# Altium PCB TCS3200.PcbDoc
Units mm, origin at the board's own origin, x right, y up, seen from the top; angles counter-clockwise.
Board outline 152.4 x 101.6 mm, 2 copper layers (Top Layer, Bottom Layer); 21 components, 15 nets, 59 pads, 11 vias.
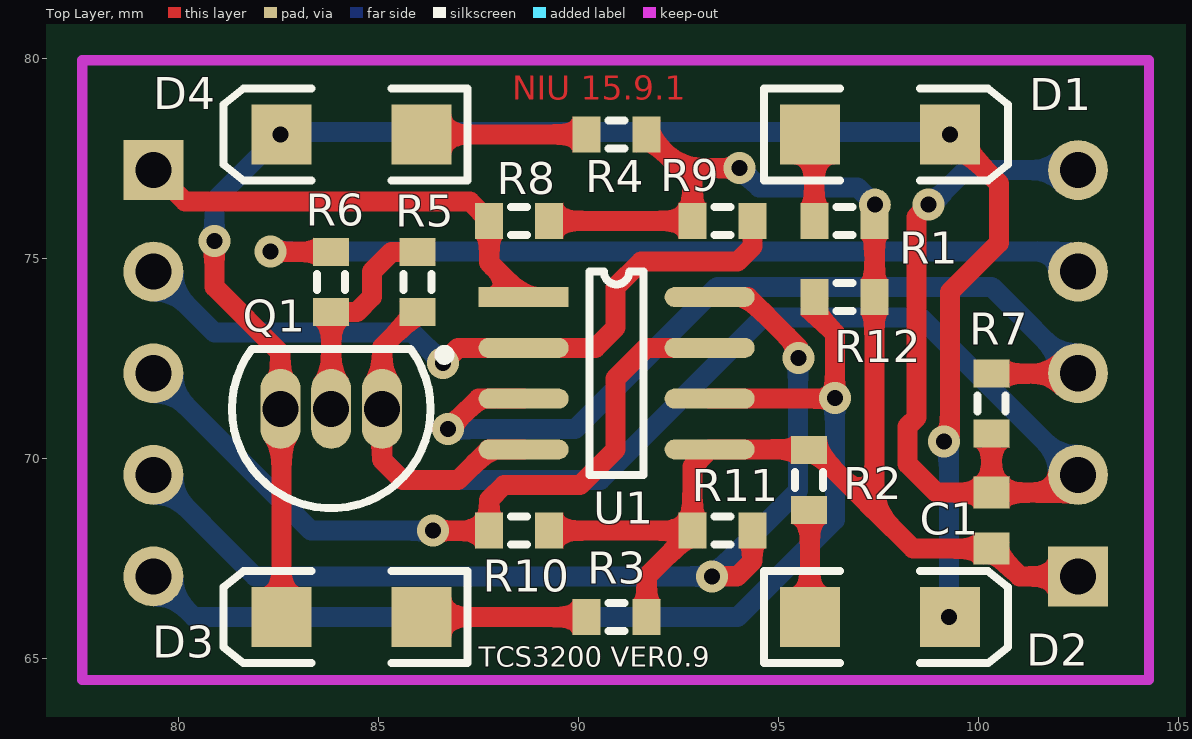
[diagram p0: Top Layer view]
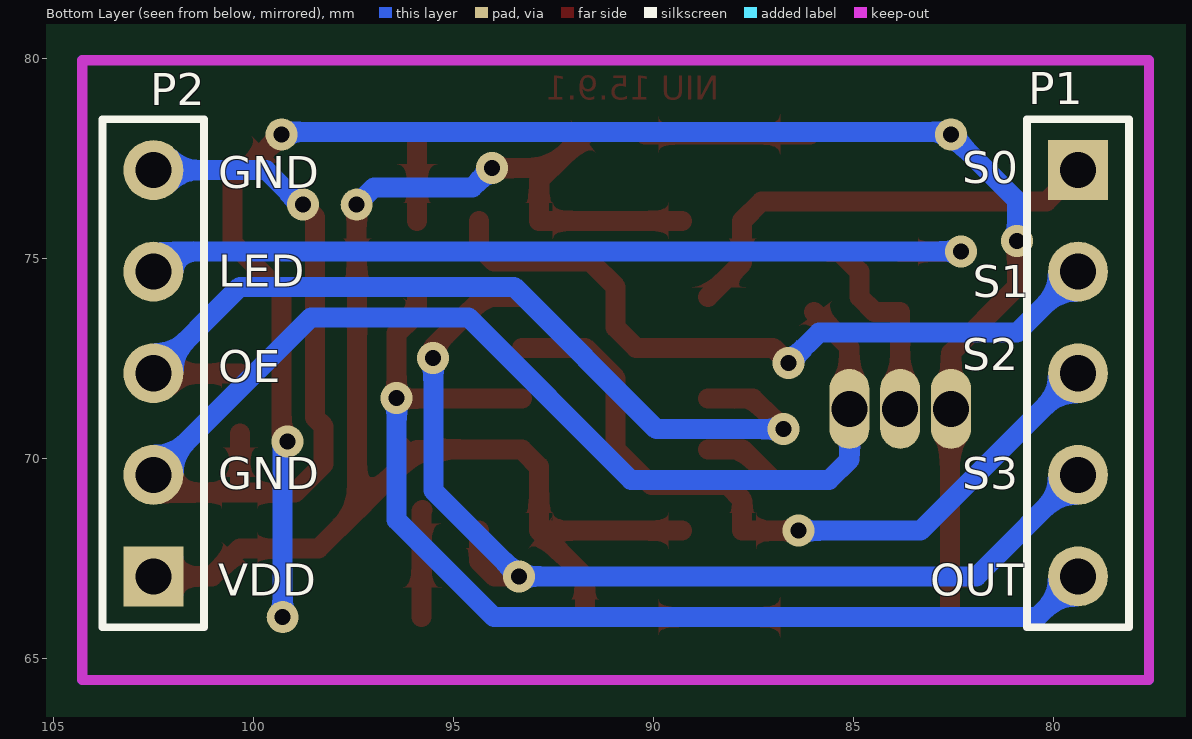
[diagram p1: Bottom Layer view, seen from below]

## Layer stack, top to bottom
Top Solder: solder mask 0.0102, Solder Resist, Dk 3.5
Top Layer: signal copper 0.0356
Dielectric 1: dielectric 0.32, FR-4, Dk 4.8
Bottom Layer: signal copper 0.0356
Bottom Solder: solder mask 0.0102, Solder Resist, Dk 3.5

## Board outline
25.4,25.4 177.8,25.4 177.8,127 25.4,127

## Design rules (kind name [scope] priority, off if disabled: settings)
Clearance [All] p1: gap=0.254
PolygonConnect [All] p1: connectstyle=Relief reliefconductorwidth=0.254 reliefentries=4 polygonreliefangle="90 Angle" airgapwidth=0.254
RoutingVias [All] p1: holewidth=0.4 width=0.8 viastyle="Through Hole" minholewidth=0.4 minwidth=0.8 maxholewidth=0.5 maxwidth=1
SolderMaskExpansion [All] p1: expansion=0.102
UnpouredPolygon [All] p1: allowunpoured=FALSE
Width Power [InNet('VCC','GND','VDD')] p1: maxlimit=1 minlimit=0.5 preferedwidth=0.5
Width Normal [All] p2: maxlimit=0.5 minlimit=0.254 preferedwidth=0.254
29 further rules are at their usual default settings.

## Components (designator, comment, footprint, x,y, rotation, side; value= is the part's Value field where it differs from the comment)
C1 "Cap Semi" 1608[0603] 100.33,68.453 r270 top
D1 "LED" 3.2X1.6X1.1 97.536,78.105 r0 top
D2 "LED" 3.2X1.6X1.1 97.536,66.04 r0 top
D3 "LED" 3.2X1.6X1.1 84.328,66.04 r180 top
D4 "LED" 3.2X1.6X1.1 84.328,78.105 r180 top
P1 "Header 5" HDR1X5 79.375,77.216 r270 bottom
P2 "Header 5" HDR1X5 102.489,67.056 r90 bottom
Q1 "2N3904" TO-92A 83.82,71.247 r90 top
R1 "" J1-0603 96.647,75.946 r0 top
R2 "" J1-0603 95.758,69.469 r90 top
R3 "" J1-0603 90.955,66.04 r0 top
R4 "" J1-0603 90.955,78.105 r0 top
R5 "" J1-0603 85.979,74.422 r270 top
R6 "" J1-0603 83.82,74.422 r270 top
R7 "" J1-0603 100.33,71.374 r90 top
R8 "" J1-0603 88.519,75.946 r180 top
R9 "" J1-0603 93.599,75.946 r0 top
R10 "" J1-0603 88.519,68.199 r180 top
R11 "" J1-0603 93.599,68.199 r0 top
R12 "" J1-0603 96.647,74.041 r0 top
U1 "TCS3200" TCS3200 88.63,74.041 r0 top

## Footprints (in the part's own frame and the unit in brackets; to place one, negate y for a bottom-side part, rotate by r counter-clockwise, add the part's x,y. Pads: shape width x height; smd on the part's side, far side on the other; paste and mask are expansions set on the pad)
3.2X1.6X1.1 [mm] "SMT LED; 2 Flat Leads"
  rect 1.5x1.5 smd: 1(-1.75,0) 2(1.75,0)
  silkscreen extent -2.9,-1.15 3.2,1.15
1608[0603] [mm] "Chip Capacitor, Body 1.6x0.8mm, IPC High Density"
  rect 0.8x0.9 smd: 1(-0.7,0) 2(0.7,0)
  body extent -0.87,-0.48 0.87,0.48, height 1.3
HDR1X5 [mm] "Connector; Header; 5 Position"
  rect 1.5x1.5 hole 0.9: 1(0,0)
  round 1.5 hole 0.9: 2(2.54,0) 3(5.08,0) 4(7.62,0) 5(10.16,0)
  silkscreen extent -1.27,-1.27 11.43,1.27
J1-0603 [mm] "Chip Resistor, Body 1.6x0.8mm, IPC High Density"
  rect 0.7x0.9 smd: 1(-0.75,0) 2(0.75,0)
  silkscreen extent -0.2,-0.35 0.2,0.35, body extent -0.85,-0.48 0.85,0.48, height 0.9
TCS3200 [mm]
  rect 2.25x0.5 smd: 1(0,0)
  oval 2.25x0.5 smd: 2(0,-1.27) 3(0,-2.54) 4(0,-3.81) 5(4.65,-3.81) 6(4.65,-2.54) 7(4.65,-1.27) 8(4.65,0)
  silkscreen extent 1.65,-4.44 3,0.64
TO-92A [mm] "TO, Flat Index; 3 In-Line, Axial Leads; Body Dia. 4.5mm; Leads 0.51 x 0.48 mm (max)"
  oval 2x1 hole 0.9: 1(0,-1.27) 2(0,0) 3(0,1.27)
  silkscreen extent -2.48,-2.96 1.5,2.48, body extent -2.5,-2.5 1.5,2.5, height 6.86

## Part data
C1: "Capacitor (Semiconductor SIM Model)"
D1 D2 D3 D4: library part LED2, "Typical RED, GREEN, YELLOW, AMBER GaAs LED"
P1 P2: "Header, 5-Pin"
Q1: "NPN General Purpose Amplifier"
R1 R2 R3 R4 R5 R6 R7 R8 R9 R10 R11 R12: library part Res3, "Resistor"

## Free pads (board coordinates)
  round 0.8 hole 0.4: 0(82.55,78.105) 0(97.409,76.352) 0(99.258,66.04) 0(99.286,78.105)

## Via types
v1: diameter 0.8, hole 0.4, Top Layer to Bottom Layer, 11 vias

## Nets (pads, with @x,y where several pads share a name; then routed paths per layer and width w, separated by ;. In a path a pad name is that pad's centre, name@x,y a point inside that pad or via, vN(x,y) a via of type N, cw(c..) or ccw(c..) an arc to the next point about the centre after c; other vN are vias at no path point)
GND: C1.1 P2.2 P2.5 Q1.1 R5.2 R7.1 U1.4 | length 47.3
  Top Layer w0.5: R5.2 85.09,72.783 Q1.1 85.09,69.977 85.598,69.469 86.995,69.469 87.757,70.231 U1.4 ; v1(98.755,76.352) 98.45,76.048 98.45,71.027 98.232,70.809 98.232,69.867 98.946,69.153 C1.1 ; R7.1 C1.1 ; P2.2 102.046,69.153 C1.1
  Bottom Layer w0.5: Q1.1 85.09,69.977 85.598,69.469 90.551,69.469 94.615,73.533 98.552,73.533 P2.2 ; v1(98.755,76.352) 98.812,76.352 99.675,77.216 P2.5
LED: P2.4 R6.1 | length 21
  Top Layer w0.5: v1@82.55,75.184 82.562,75.172 R6.1
  Bottom Layer w0.5: v1(82.296,75.184) P2.4@101.981,75.184
NetD1_1: D1.1 R1.1 | length 2
  Top Layer w0.5: R1.1 D1.1@95.897,77.994
NetD1_2: D1.2 D2.2 D3.2 D4.2 pad.0@82.55,78.105 pad.0@99.258,66.04 pad.0@99.286,78.105 Q1.3 | length 43.4
  Top Layer w0.5: v1(80.899,75.438) 80.899,74.295 82.55,72.644 Q1.3 82.578,71.219 D3.2 ; v1(99.136,70.434) 99.286,70.584 99.286,74.168 100.508,75.39 100.508,76.883 D1.2
  Bottom Layer w0.5: v1(80.899,75.438) 80.899,76.454 82.55,78.105 82.616,78.171 99.22,78.171 pad.0@99.286,78.105 ; v1(99.136,70.434) 99.258,70.312 pad.0@99.258,66.04
NetD2_1: D2.1 R2.1 | length 2.7
  Top Layer w0.5: R2.1 95.786,68.691 D2.1
NetD3_1: D3.1 R3.1 | length 4.1
  Top Layer w0.5: D3.1 R3.1
NetD4_1: D4.1 R4.1 | length 4.1
  Top Layer w0.5: D4.1 R4.1
NetQ1_2: Q1.2 R5.1 R6.2 | length 5.2
  Top Layer w0.5: Q1.2 R6.2 84.467,73.672 84.836,74.041 84.836,74.676 85.332,75.172 R5.1@85.598,75.172
OE: P2.3 R7.2 U1.3 | length 22.5
  Top Layer w0.5: v1(86.741,70.739) 87.503,71.501 U1.3 ; R7.2 102.477,72.124 P2.3
  Bottom Layer w0.5: v1(86.741,70.739) 89.916,70.739 93.472,74.295 100.33,74.295 P2.3
OUT: P1.5 R12.1 U1.6 | length 27.4
  Top Layer w0.5: U1.6 96.393,71.501 v1(96.408,71.516) 96.408,73.137 95.897,73.648 R12.1
  Bottom Layer w0.5: P1.5 80.391,66.04 93.98,66.04 96.408,68.468 v1(96.408,71.516)
S0: P1.1 R8.2 U1.1 | length 11.2
  Top Layer w0.5: P1.1 80.162,76.429 87.286,76.429 R8.2 87.769,74.902 U1.1
S1: P1.2 R9.2 U1.2 | length 18.2
  Top Layer w0.5: v1(86.614,72.39) 86.995,72.771 U1.2 90.424,72.771 90.932,73.279 90.932,74.295 91.567,74.93 93.98,74.93 94.349,75.299 R9.2
  Bottom Layer w0.5: P1.2 80.899,73.152 85.852,73.152 v1@86.487,72.517
S2: P1.3 R10.2 U1.7 | length 19.2
  Top Layer w0.5: v1(86.36,68.199) 86.233,68.199 R10.2 87.769,68.973 88.138,69.342 90.043,69.342 90.932,70.231 90.932,72.009 91.694,72.771 U1.7
  Bottom Layer w0.5: P1.3 83.312,68.199 v1(86.36,68.199)
S3: P1.4 R11.2 U1.8 | length 26.3
  Top Layer w0.5: U1.8 94.234,74.041 95.504,72.771 v1(95.504,72.517) ; v1(93.345,67.056) 93.968,67.056 94.349,67.437 R11.2
  Bottom Layer w0.5: P1.4 81.915,67.056 v1(93.345,67.056) 95.489,69.2 95.489,72.502 v1(95.504,72.517)
VDD: C1.2 P2.1 pad.0@97.409,76.352 R1.2 R2.2 R3.2 R4.2 R8.1 R9.1 R10.1 R11.1 R12.2 U1.5 | length 37.9
  Top Layer w0.5: R10.1 R11.1 ; R8.1 R9.1 92.849,76.961 92.543,77.267 ; R3.2 91.705,67.055 R11.1 ; R4.2 92.543,77.267 ; v1(94.031,77.267) 92.543,77.267 ; R2.2@95.643,70.231 U1.5 92.849,69.8 R11.1 ; R2.2 95.897,70.219 97.397,68.719 ; R1.2@97.409,76.352 R12.2 97.397,68.719 ; P2.1 101.027,67.056 C1.2 98.363,67.753 97.397,68.719
  Bottom Layer w0.5: v1(94.031,77.267) 94.513,76.784 96.977,76.784 pad.0@97.409,76.352

## Keep-outs
Keep-Out Layer:
  lines w0.254: 77.597,64.465 77.597,79.959 104.267,79.959 104.267,64.465 77.597,64.465

## Other copper
Top Layer:
  text "NIU 15.9.1" at 88.341,78.969 h0.6

## Silkscreen, mask and mechanical layers (free items; w line width, h text height)
Top Overlay:
  text "TCS3200 VER0.9" at 87.503,64.795 h0.5
Bottom Overlay:
  text "S0" at 82.271,76.886 h0.8
  text "GND" at 100.863,76.759 h0.8
  text "LED" at 100.863,74.295 h0.8
  text "S1" at 82.004,74.041 h0.8
  text "S2" at 82.271,72.212 h0.8
  text "OE" at 100.863,71.907 h0.8
  text "S3" at 82.271,69.24 h0.8
  text "GND" at 100.863,69.24 h0.8
  text "OUT" at 83.07,66.573 h0.8
  text "VDD" at 100.863,66.573 h0.8